# Altium PCB Anahata_Control_PCB.PcbDoc
Units mm, origin at the board's own origin, x right, y up, seen from the top; angles counter-clockwise.
Board outline 21.04 x 34.42 mm, 4 copper layers (Top Layer, Layer 1, Layer 2, Bottom Layer), stack 0.603 mm thick; 38 components, 50 nets, 148 pads, 12 vias.
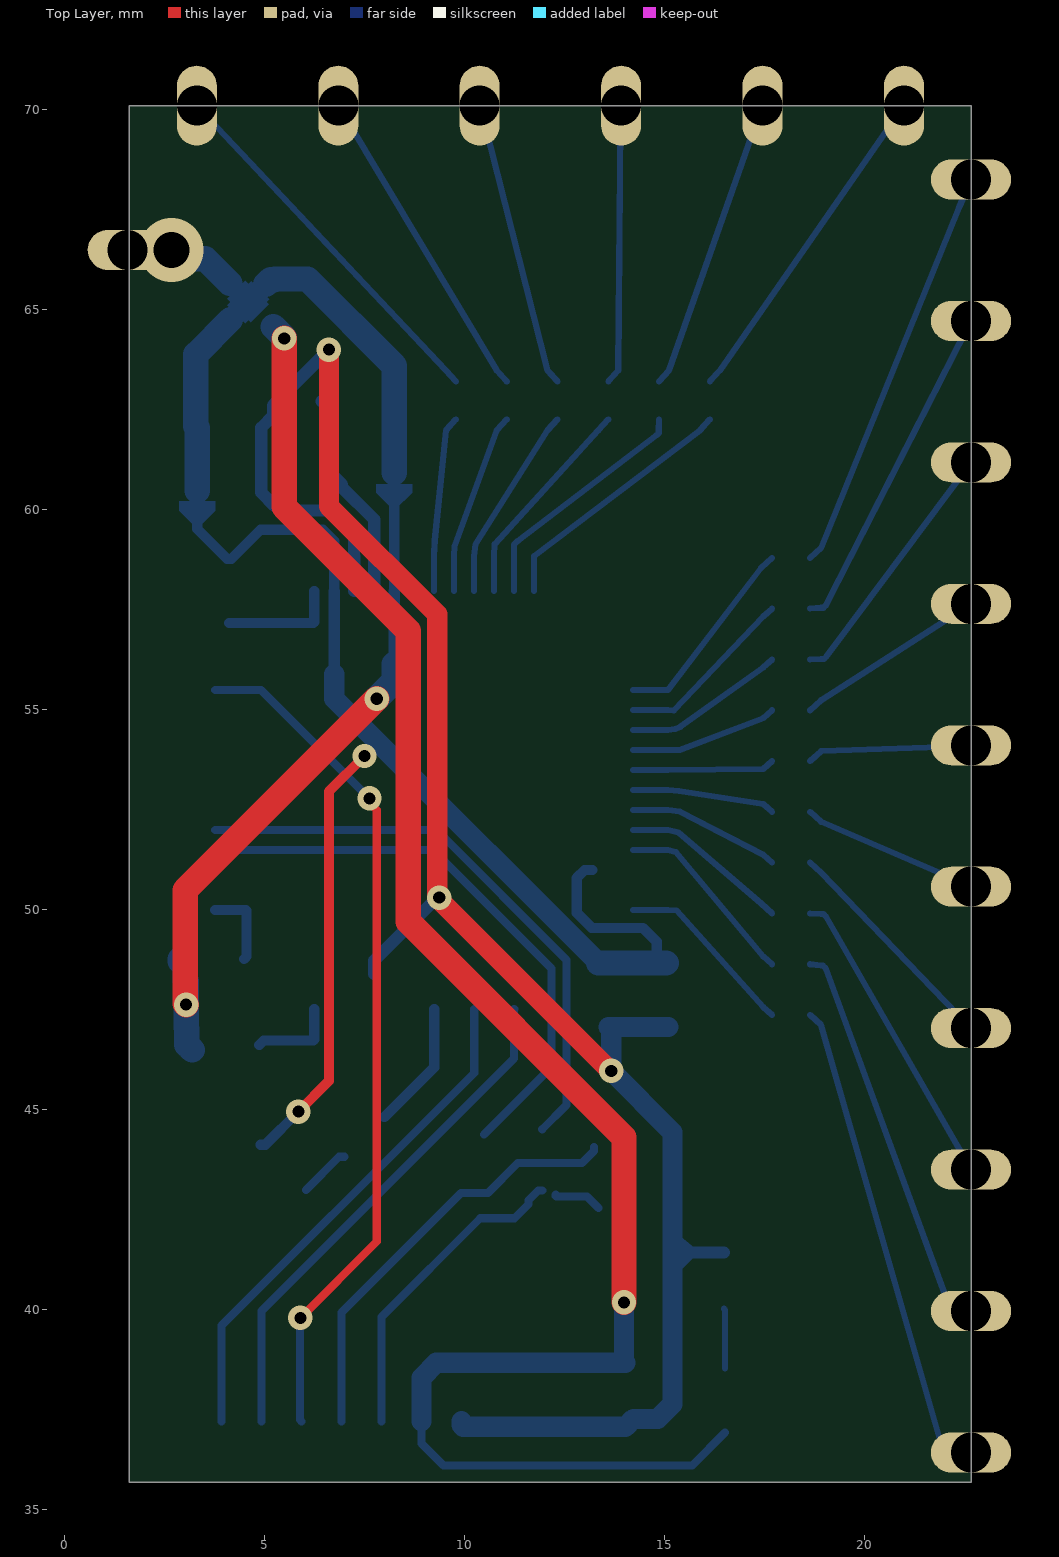
[diagram p0: Top Layer view]
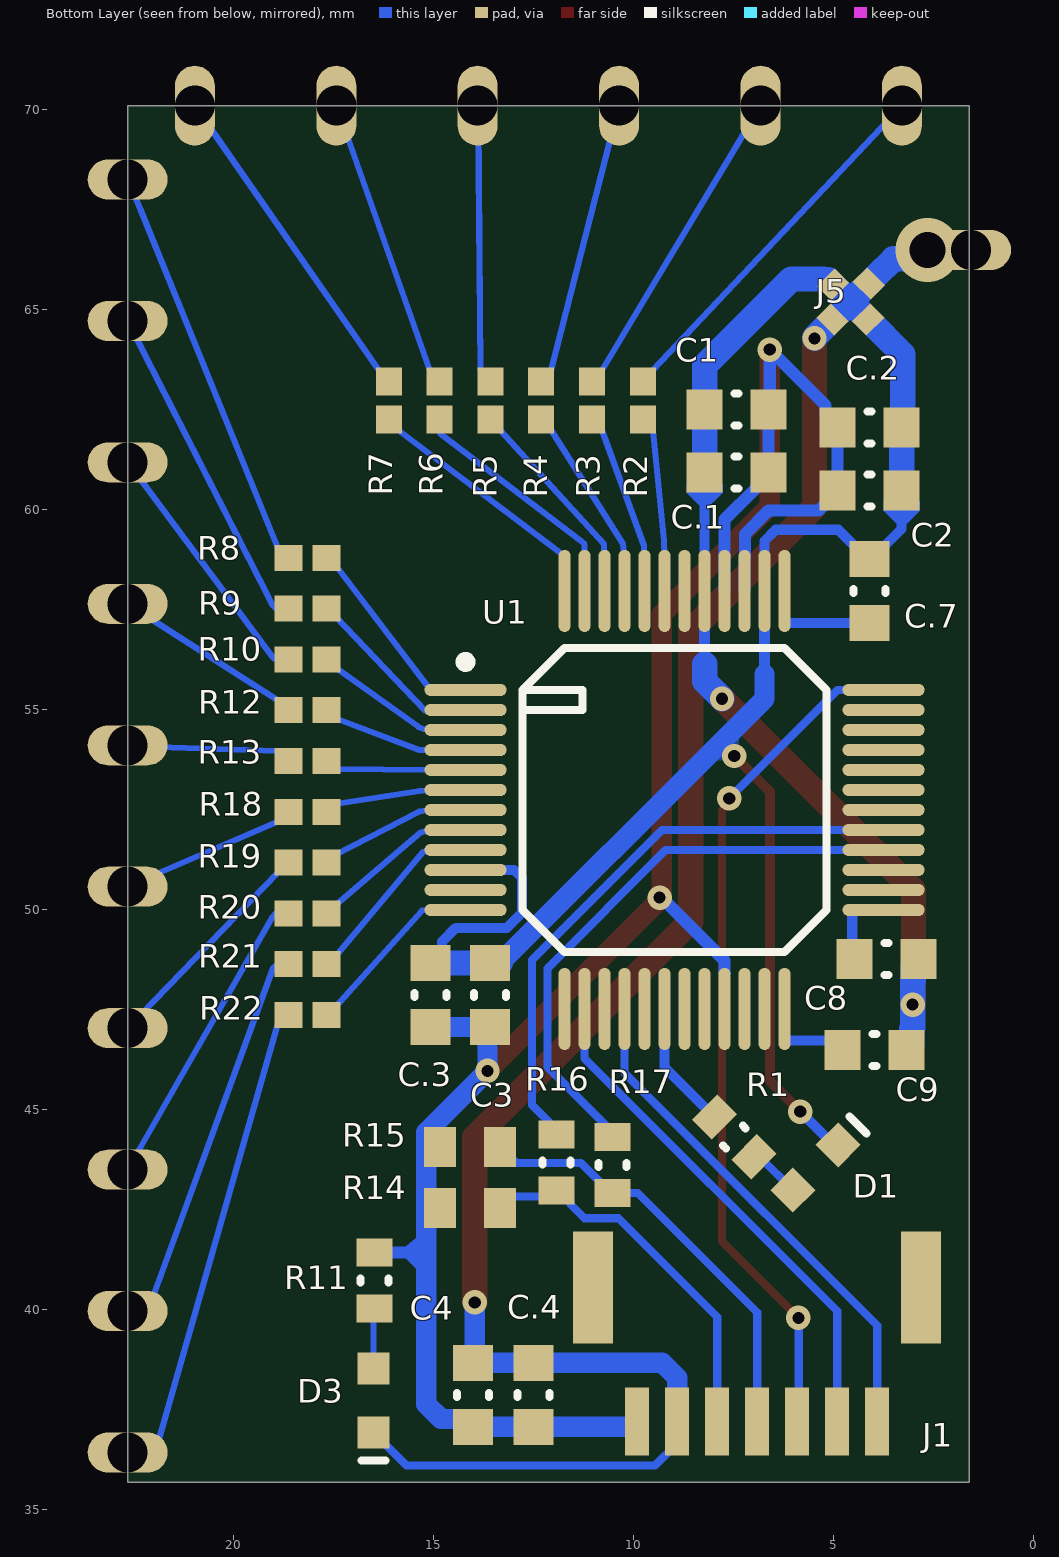
[diagram p1: Bottom Layer view, seen from below]

## Layer stack, top to bottom
Top Solder: solder mask 0.0102, Solder Resist, Dk 3.5
Top Layer: signal copper 0.0356
Dielectric 2: prepreg 0.0711, PP-006, Dk 4.1
Layer 1: signal copper 0.035
Dielectric 1: dielectric 0.32, FR-4, Dk 4.8
Layer 2: signal copper 0.035
Dielectric 3: prepreg 0.0711, PP-006, Dk 4.1
Bottom Layer: signal copper 0.0356
Bottom Solder: solder mask 0.0102, Solder Resist, Dk 3.5

## Board outline
1.612,35.687 22.657,35.687 22.657,70.104 1.612,70.104

## Design rules (kind name [scope] priority, off if disabled: settings)
BoardOutlineClearance [All] p1: gap=0.254 ignorepadtopadclearanceinfootprint=FALSE except(0: Arc-SplitContinuation Track-SplitContinuation SMDPad-SplitContinuation THPad-SplitContinuation Via-SplitContinuation Fill-SplitContinuation Poly-SplitContinuation Region-SplitContinuation Text-SplitContinuation; 0.508: Poly-OutlineEdge Poly-CavityEdge Poly-CutoutEdge Poly-SplitBarrior)
Clearance [All] p1: gap=0.152 ignorepadtopadclearanceinfootprint=FALSE except(0.305: Arc-Hole Track-Hole SMDPad-Hole THPad-Hole Via-Hole Fill-Hole Poly-Hole Region-Hole)
HoleSize [All] p1: absolutevalues=TRUE maxlimit=6.3 minlimit=0.3 maxpercent=80.000 minpercent=20.000
MinimumAnnularRing [All] p1: minimumring=0.152
MinimumSolderMaskSliver [All] p1: minsoldermaskwidth=0.178
PolygonConnect PolygonConnect_1 [All] p1: thpad.connectstyle=Relief thpad.reliefconductorwidth=0.254 thpad.reliefentries=4 thpad.polygonreliefangle="90 Angle" thpad.airgapwidth=0.254 smdpad.connectstyle=Direct smdpad.reliefconductorwidth=0.254 smdpad.reliefentries=4 smdpad.polygonreliefangle="90 Angle" smdpad.airgapwidth=0.254 via.connectstyle=Direct via.reliefconductorwidth=0.254 via.reliefentries=4 via.polygonreliefangle="90 Angle" via.airgapwidth=0.254
PolygonConnect gnd_stitch_via [InNet('GND') vs InNet('GND')] p2: thpad.connectstyle=Relief thpad.reliefconductorwidth=0.254 thpad.reliefentries=4 thpad.polygonreliefangle="90 Angle" thpad.airgapwidth=0.254 smdpad.connectstyle=Relief smdpad.reliefconductorwidth=0.254 smdpad.reliefentries=4 smdpad.polygonreliefangle="90 Angle" smdpad.airgapwidth=0.254 via.connectstyle=Direct via.reliefconductorwidth=0.254 via.reliefentries=4 via.polygonreliefangle="90 Angle" via.airgapwidth=0.254
PolygonConnect gnd_ties [InComponentClass('net_ties')] p3: connectstyle=Direct reliefconductorwidth=0.254 reliefentries=4 polygonreliefangle="90 Angle" airgapwidth=0.254
RoomDefinition Power [InComponentClass('Power')] p1: confinementstyle=ConfineOut formatcopy=TRUE lockcomponents=FALSE outline 47.346,-89.306 98.146,-89.306 98.146,-63.906 47.346,-63.906
RoomDefinition CY8C4125AZI-S433 [InComponentClass('CY8C4125AZI-S433')] p2: confinementstyle=ConfineOut formatcopy=TRUE lockcomponents=FALSE outline -10.363,-89.306 40.437,-89.306 40.437,-63.906 -10.363,-63.906
RoomDefinition CSX_Capsense [InComponentClass('CSX_Capsense')] p3: confinementstyle=ConfineOut formatcopy=TRUE lockcomponents=FALSE outline 57.455,-42.062 65.964,-42.062 65.964,-37.49 57.455,-37.49
RoomDefinition Comm [InComponentClass('Comm')] p4: confinementstyle=ConfineOut formatcopy=TRUE lockcomponents=FALSE outline 60.96,-47.244 64.77,-47.244 64.77,-42.672 60.96,-42.672
RoutingVias [All] p1: holewidth=0.711 width=1.27 viastyle="Through Hole" minholewidth=0.305 minwidth=0.61 maxholewidth=1.27 maxwidth=2.54
SilkToSilkClearance [All] p1: silktosilkclearance=0.102
SilkToSolderMaskClearance [IsPad] p1: minsilkscreentomaskgap=0.178 clearancetoexposedcopper=TRUE
SolderMaskExpansion [All] p1: expansion=0.102 istentingtop=FALSE
Width [All] p1: maxlimit=3.556 minlimit=0.152 preferedwidth=0.254 toplayer_maxwidth=2.54 midlayer1_maxwidth=2.54 midlayer2_maxwidth=2.54 minimp=50.000000 maximp=50.000000 favimp=50.000000
26 further rules are at their usual default settings.

## Classes and differential pairs
component class Power: D3 J5 R11
component class CY8C4125AZI-S433: C1 C2 C3 C.1 C.2 C.3 C.7 R14 R15 R16 R17 U1
component class CSX_Capsense: C8 C9 R2 R3 R4 R5 R6 R7 R8 R9 R10 R12 R13 R18 R19 R20 R21 R22
component class Comm: C4 C.4 D1 J1 R1

## Components (designator, comment, footprint, x,y, rotation, side; value= is the part's Value field where it differs from the comment)
C1 "1uF" CAPC0603(1608)100_N 7.436,62.503 r180 bottom
C2 "1uF" CAPC0603(1608)100_N 4.111,60.482 r180 bottom
C3 "1uF" CAPC0603(1608)100_N 13.594,47.873 r90 bottom
C4 "1uF" CAPC0603(1608)100_N 14.021,37.877 r90 bottom
C8 "470pF" CAPC0603(1608)100_N 3.683,48.768 r180 bottom
C9 "470pF" CAPC0603(1608)100_N 3.986,46.497 r180 bottom
C.1 "0.1uF" CAPC0603(1608)100_N 7.436,60.932 r180 bottom value=1uF
C.2 "0.1uF" CAPC0603(1608)100_N 4.111,62.053 r180 bottom value=1uF
C.3 "0.1uF" CAPC0603(1608)100_N 15.086,47.873 r90 bottom value=1uF
C.4 "0.1uF" CAPC0603(1608)100_N 12.512,37.877 r90 bottom value=1uF
C.7 "0.1uF" CAPC0603(1608)100_N 4.111,57.973 r90 bottom value=1uF
D1 "150060BS75000" 0603_A 5.461,43.561 r315 bottom
D3 "150060BS75000" 0603_A 16.509,37.731 r90 bottom
J1 "BM07B-NSHSS-TBT (LF)(SN)" "BM07B-NSHSS-TBT (LF)(SN)" 16.919,45.214 r0 bottom
J5 "Star_tie" Star_tie -464.314,-427.229 r225 bottom net-tie
R1 "330" RESC0603(1608)_L 7.493,44.323 r225 bottom value="330.00 Ohm"
R2 "RC0402JR-072KL" RESC1005X40X25ML05T10 9.779,62.738 r270 bottom
R3 "RC0402JR-072KL" RESC1005X40X25ML05T10 11.049,62.738 r270 bottom
R4 "RC0402JR-072KL" RESC1005X40X25ML05T10 12.319,62.738 r270 bottom
R5 "RC0402JR-072KL" RESC1005X40X25ML05T10 13.589,62.738 r270 bottom
R6 "RC0402JR-072KL" RESC1005X40X25ML05T10 14.859,62.738 r270 bottom
R7 "RC0402JR-072KL" RESC1005X40X25ML05T10 16.129,62.738 r270 bottom
R8 "RC0402JR-072KL" RESC1005X40X25ML05T10 18.161,58.801 r0 bottom
R9 "RC0402JR-072KL" RESC1005X40X25ML05T10 18.161,57.531 r0 bottom
R10 "RC0402JR-072KL" RESC1005X40X25ML05T10 18.161,56.261 r0 bottom
R11 "330" RESC0603(1608)_L 16.485,40.732 r270 bottom value="330.00 Ohm"
R12 "RC0402JR-072KL" RESC1005X40X25ML05T10 18.161,54.991 r0 bottom
R13 "RC0402JR-072KL" RESC1005X40X25ML05T10 18.161,53.721 r0 bottom
R14 "4.7K" RESC1608X55X25ML10T15 14.097,42.545 r0 bottom
R15 "4.7K" RESC1608X55X25ML10T15 14.097,44.069 r0 bottom
R16 "330" RESC0603(1608)_L 11.938,43.688 r270 bottom value="330.00 Ohm"
R17 "330" RESC0603(1608)_L 10.541,43.623 r270 bottom value="330.00 Ohm"
R18 "RC0402JR-072KL" RESC1005X40X25ML05T10 18.161,52.451 r0 bottom
R19 "RC0402JR-072KL" RESC1005X40X25ML05T10 18.161,51.181 r0 bottom
R20 "RC0402JR-072KL" RESC1005X40X25ML05T10 18.161,49.911 r0 bottom
R21 "RC0402JR-072KL" RESC1005X40X25ML05T10 18.161,48.641 r0 bottom
R22 "RC0402JR-072KL" RESC1005X40X25ML05T10 18.161,47.371 r0 bottom
U1 "CY8C4125AZI-S433" CY8C4125AZI-S433 8.986,52.748 r180 bottom locked

## Footprints (in the part's own frame and the unit in brackets; to place one, negate y for a bottom-side part, rotate by r counter-clockwise, add the part's x,y. Pads: shape width x height; smd on the part's side, far side on the other; paste and mask are expansions set on the pad)
0603_A [mm] "Chip LED, 2-Leads, Body 1.6x0.8mm, IPC Medium Density"
  rect 0.8x0.8 smd: 1(-0.8,0) 2(0.8,0)
  silkscreen extent -1.5,-0.3 -1.5,0.3, body extent -0.8,-0.4 0.8,0.4, height 0.7
"BM07B-NSHSS-TBT (LF)(SN)" [mm]
  rect 1x2.8 smd paste-2.54 mask+0.1: 0(-14.1,4.65) 0(-5.9,4.65)
  rect 0.6x1.7 smd paste-2.54 mask+0.1: 1(-13,8) 2(-12,8) 3(-11,8) 4(-10,8) 5(-9,8) 6(-8,8) 7(-7,8)
CAPC0603(1608)100_N [mm] "Chip Capacitor, Body 1.6x0.8mm, Height 1.0mm, IPC Medium Density"
  rect 0.9x1 smd: 1(-0.8,0) 2(0.8,0)
  silkscreen extent -0.05,-0.4 0.05,0.4, body extent -0.87,-0.48 0.88,0.47, height 1
CY8C4125AZI-S433 [mm] "CQFP, 48-Leads, Body 11.70x11.70mm, Pitch 0.50mm, IPC Medium Density"
  oval 2.05x0.3 smd: 1(-5.225,2.75) 2(-5.225,2.25) 3(-5.225,1.75) 4(-5.225,1.25) 5(-5.225,0.75) 6(-5.225,0.25) 7(-5.225,-0.25) 8(-5.225,-0.75) 9(-5.225,-1.25) 10(-5.225,-1.75) 11(-5.225,-2.25) 12(-5.225,-2.75) 25(5.225,-2.75) 26(5.225,-2.25) 27(5.225,-1.75) 28(5.225,-1.25) 29(5.225,-0.75) 30(5.225,-0.25) 31(5.225,0.25) 32(5.225,0.75) 33(5.225,1.25) 34(5.225,1.75) 35(5.225,2.25) 36(5.225,2.75)
  oval 0.3x2.05 smd: 13(-2.75,-5.225) 14(-2.25,-5.225) 15(-1.75,-5.225) 16(-1.25,-5.225) 17(-0.75,-5.225) 18(-0.25,-5.225) 19(0.25,-5.225) 20(0.75,-5.225) 21(1.25,-5.225) 22(1.75,-5.225) 23(2.25,-5.225) 24(2.75,-5.225) 37(2.75,5.225) 38(2.25,5.225) 39(1.75,5.225) 40(1.25,5.225) 41(0.75,5.225) 42(0.25,5.225) 43(-0.25,5.225) 44(-0.75,5.225) 45(-1.25,5.225) 46(-1.75,5.225) 47(-2.25,5.225) 48(-2.75,5.225)
  silkscreen extent -5.35,-3.8 3.8,3.8, body extent -3.5,-3.5 3.5,3.5, height 1.4
RESC0603(1608)_L [mm] "Chip Resistor, Body 1.6x0.8mm, IPC High Density"
  rect 0.7x0.9 smd: 1(-0.7,0) 2(0.7,0)
  silkscreen extent -0.05,-0.35 0.05,0.35, body extent -0.85,-0.47 0.85,0.47, height 0.6
RESC1005X40X25ML05T10 [mm] "Chip Resistor, 2-Leads, Body 1.00x0.50mm, IPC Low Density"
  rect 0.7x0.65 smd: 1(-0.475,0) 2(0.475,0)
  body extent -0.53,-0.27 0.53,0.28, height 0.4
RESC1608X55X25ML10T15 [mm] "Chip Resistor, 2-Leads, Body 1.60x0.80mm, IPC Low Density"
  rect 0.8x1 smd: 1(-0.75,0) 2(0.75,0)
  body extent -0.85,-0.45 0.85,0.45, height 0.55
Star_tie [mil]
  rect 25x20 smd paste-100 mask-100: 1(-26762.49,680.64) 3(-26762.49,630.26)
  rect 20x25 smd paste-100 mask-100: 2(-26737.66,654.99) 4(-26786.7,654.78)
  Top Layer region: -26745.42,667.45 -26745.42,642.48 -26778.84,642.46 -26778.84,667.42 -26763.57,667.28
  Top Layer region: -26774.88,671.64 -26749.93,671.64 -26749.91,638.84 -26774.87,638.84 -26774.72,654.84

## Part data
C1 C2 C3 C4: library part CMP-1035-02746-1, "CAP 1uF 50V ±20% 0603 (1608 Metric) Thickness 1mm SMD", Case-EIA=0603, Case-Metric=1608, Rated Voltage="50 V", Tolerance=Â±20%, Max Thickness="1 mm", Technology=SMT
C8 C9: library part CMP-1035-01661-1, "CAP 470pF 10V ±10% 0603 (1608 Metric) Thickness 1mm SMD", Case-EIA=0603, Case-Metric=1608, Rated Voltage="10 V", Tolerance=Â±10%, Max Thickness="1 mm", Technology=SMT
C.1 C.2 C.3 C.4 C.7: library part CMP-1035-02746-1, "CAP 0.1 uF 50V ±20% 0603 (1608 Metric) Thickness 1mm SMD", Case-EIA=0603, Case-Metric=1608, Rated Voltage="50 V", Tolerance=Â±20%, Max Thickness="1 mm", Technology=SMT
D1 D3: library part CMP-1426-00003-1, "SMD mono-color Chip LED, WL-SMCW, Blue", Color=Blue, Manufacturer="Wuerth Elektronik", ComponentLink1Description="Manufacturer URL", ComponentLink1URL=http://www.we-online.com, ComponentLink2Description=Datasheet, ComponentLink2URL=http://katalog.we-online.com/led/datasheet/150060BS75000.pdf, PackageReference=0603_A, PartNumber=150060BS75000
R1 R11 R16 R17: library part CMP-1012-00062-1, "330R 0.1W 5% 0603 (1608 Metric)  SMD", Case-EIA=0603, Case-Metric=1608, Power="0.1 W", Tolerance="5 %", Technology=SMT
R2 R3 R4 R5 R6 R7 R8 R9 R10 R12 R13 R18 R19 R20 R21 R22: library part CMP-2002-07972-1, Manufacturer="Yageo / Phycomp", Part Number=RC0402JR-072KL
R14 R15: library part CMP-2000-05024-1, "RC0603JR-074K7L Chip Resistor, 4.7 KOhm, +/- 5%, 100 mW, -55 to 155 degC, 0603 (1608 Metric), RoHS, Tape and Reel", Case Code - in=0603, Case Code - mm=1608, Manufacturer=Yageo, Operating Temperature Range=-55Cto+155C, Package Description="2-Pin Surface Mount Device, Body 1.6 x 0.8 mm", Package Reference=603, Power Rating=100mW, Resistance=4.7kOhms, Temperature Coefficient=100PPM/C, Tolerance=5%, Voltage Rating=50V, Datasheet URL=http://www.yageo.com/documents/recent/PYu-RC_Group_51_RoHS_L_04.pdf, Datasheet Version="Rev. 4, 02/2016", Manufacturer URL=http://www.yageo.com/, Packaging=Reel, Product=ThickFilmResistorsGeneralPurpose, Series=RC, Termination Style=SMD/SMT

## Free pads (board coordinates)
  oval 2x1 hole 1: 4(1.574,66.499) 4(22.657,36.435) 4(22.657,39.971) 4(22.657,43.507) 4(22.657,47.043) 4(22.657,50.579) 4(22.657,54.115) 4(22.657,57.651) 4(22.657,64.722) 4(22.657,68.258) 4(22.657,61.187)
  oval 1x2 hole 1: 4(3.302,70.104) 4(6.838,70.104) 4(10.373,70.104) 4(13.909,70.104) 4(17.444,70.104) 4(20.979,70.104)

## Via types
v1: diameter 0.61/0.61/0.61/0.61 (per signal layer), hole 0.305, Top Layer to Bottom Layer, 11 vias
v2: diameter 1.6, hole 0.9, Top Layer to Bottom Layer, 1 vias

## Nets (pads, with @x,y where several pads share a name; then routed paths per layer and width w, separated by ;. In a path a pad name is that pad's centre, name@x,y a point inside that pad or via, vN(x,y) a via of type N, cw(c..) or ccw(c..) an arc to the next point about the centre after c; other vN are vias at no path point)
+3v3: C1.2 C2.1 C3.1 C4.1 C.1.2 C.2.1 C.3.1 C.4.1 J1.7 R11.1 R14.2 R15.2 U1.21 U1.39 U1.40 | length 57.3
  Top Layer w0.508: v1(6.604,64.008) 6.604,60.093 9.31,57.387 9.31,50.357 v1(9.361,50.306) ; v1@9.31,50.306 13.642,45.974 v1(13.661,45.974)
  Bottom Layer w0.305: U1.39 7.236,58.843 7.227,58.852 7.227,59.391 6.636,59.982 5.383,59.982 5.256,60.109 5.234,60.109 4.911,60.432 C2.1 C.2.1 5.209,62.351 5.209,62.613 v1(6.604,64.008) 6.604,62.891 6.426,62.713 C1.2 C.1.2 6.934,60.634 6.934,60.561 7.736,59.759 U1.40 ; U1.21@7.736,48.395 7.736,48.733 9.31,50.306 v1(9.361,50.306) ; 15.103,41.541 15.192,41.451 15.211,41.432 R11.1
  Bottom Layer w0.508: J1.7 9.919,37.123 9.965,37.077 C.4.1 C4.1 14.217,37.273 14.825,37.273 15.192,37.64 15.192,41.451 15.192,44.443 v1(13.661,45.974) 13.661,47.005 C3.1 C.3.1
CintA: C9.1 U1.24 | length 2.2
  Bottom Layer w0.254: C9.1@4.861,46.622 4.975,46.736 6.215,46.736 6.236,46.757 U1.24
CintB: C8.1 U1.25 | length 2
  Bottom Layer w0.254: U1.25 4.524,49.998 4.546,49.977 4.546,48.831 C8.1
GND: C4.2 C.4.2 D3.1 J1.6 J5.3 | length 44.6
  Top Layer w0.635: v1(5.486,64.287) 5.486,60.074 8.586,56.974 8.586,49.707 13.98,44.313 v1(13.98,40.188)
  Bottom Layer w0.203: J1.6 8.919,36.664 9.473,36.11 15.687,36.11 D3.1
  Bottom Layer w0.508: J1.6 8.919,38.305 9.291,38.677 C.4.2 C4.2 13.98,38.718 v1(13.98,40.188)
  Bottom Layer w0.635: J5.3@5.213,64.58 5.486,64.307 v1(5.486,64.287)
LED2: R1.1 U1.18 | length 3.2
  Bottom Layer w0.254: R1.1 9.236,46.066 U1.18
NetC.7_1: C.7.1 U1.37 | length 2.9
  Bottom Layer w0.254: C.7.1 6.215,57.173 6.236,57.194 U1.37
NetD1_2: D1.2 R1.2 | length 1.3
  Bottom Layer w0.203: D1.2 6.859,43.828 R1.2
NetD3_2: D3.2 R11.2 | length 1.5
  Bottom Layer w0.152: R11.2 16.481,40.029 16.509,40.001 D3.2
NetR16_1: R16.1 U1.29 | length 14.6
  Bottom Layer w0.203: U1.29 9.3,51.998 12.548,48.75 12.548,45.125 R16.1@11.938,44.515
NetR17_1: R17.1 U1.28 | length 14.5
  Bottom Layer w0.203: U1.28 9.207,51.498 12.167,48.539 12.167,46.076 R17.1@10.477,44.386
RX0: R8.1 U1.1 | length 5.1
  Bottom Layer w0.152: U1.1 15.086,55.498 17.412,58.552 R8.1
RX0_PAD: pad.4@22.657,68.258 R8.2 | length 10.3
  Bottom Layer w0.152: R8.2 18.91,59.05 22.326,67.481 22.37,67.585 pad.4@22.657,68.258
RX1: R9.1 U1.2 | length 4.6
  Bottom Layer w0.152: U1.2 15.086,54.998 15.225,54.986 17.463,57.333 R9.1
RX1_PAD: pad.4@22.657,64.722 R9.2 | length 8.4
  Bottom Layer w0.152: R9.2 18.91,57.552 18.967,57.552 19.028,57.614 22.366,64.153 pad.4@22.657,64.722
RX2: R10.1 U1.3 | length 4
  Bottom Layer w0.152: U1.3 15.086,54.498 15.258,54.517 15.393,54.579 17.463,56.063 R10.1
RX2_PAD: pad.4@22.657,61.187 R10.2 | length 6.5
  Bottom Layer w0.152: R10.2 18.91,56.27 18.979,56.27 19.032,56.322 22.326,60.743 22.357,60.784 pad.4@22.657,61.187
RX3: R12.1 U1.4 | length 3.7
  Bottom Layer w0.152: U1.4 15.086,53.998 15.373,54 17.463,54.793 R12.1
RX3_PAD: pad.4@22.657,57.651 R12.2 | length 4.8
  Bottom Layer w0.152: R12.2 18.91,55.24 22.338,57.44 pad.4@22.657,57.651
RX4: R13.1 U1.5 | length 3.6
  Bottom Layer w0.152: U1.5 15.086,53.498 17.463,53.523 R13.1
RX4_PAD: pad.4@22.657,54.115 R13.2 | length 4.1
  Bottom Layer w0.152: R13.2 18.91,53.97 22.326,54.083 pad.4@22.657,54.115
RX5: R18.1 U1.6 | length 3.6
  Bottom Layer w0.152: U1.6 15.086,52.998 15.357,52.976 17.463,52.649 R18.1
RX5_PAD: pad.4@22.657,50.579 R18.2 | length 4.5
  Bottom Layer w0.152: R18.2 18.91,52.202 22.329,50.731 pad.4@22.657,50.579
RX6: R19.1 U1.7 | length 3.8
  Bottom Layer w0.152: U1.7 15.086,52.498 15.378,52.457 17.463,51.379 R19.1
RX6_PAD: pad.4@22.657,47.043 R19.2 | length 5.8
  Bottom Layer w0.152: R19.2 18.91,50.932 22.326,47.383 22.349,47.359 pad.4@22.657,47.043
RX7: R20.1 U1.8 | length 4.2
  Bottom Layer w0.152: U1.8 15.086,51.998 15.34,51.934 17.412,50.16 R20.1
RX7_PAD: pad.4@22.657,43.507 R20.2 | length 7.7
  Bottom Layer w0.152: R20.2 18.91,49.893 18.971,49.893 19.03,49.834 22.326,44.083 22.363,44.019 pad.4@22.657,43.507
RX8: R21.1 U1.9 | length 4.8
  Bottom Layer w0.152: U1.9 15.086,51.498 15.274,51.446 17.463,48.839 R21.1
RX8_PAD: pad.4@22.657,39.971 R21.2 | length 10
  Bottom Layer w0.152: R21.2 18.91,48.609 18.954,48.609 19.023,48.541 22.157,39.971 22.379,39.974 pad.4@22.657,39.971
RX9: R22.1 U1.12 | length 4.6
  Bottom Layer w0.152: U1.12 15.086,49.998 15.296,49.983 17.463,47.569 R22.1
RX9_PAD: pad.4@22.657,36.435 R22.2 | length 12.1
  Bottom Layer w0.152: R22.2 18.91,47.122 21.913,36.636 21.991,36.558 pad.4@22.657,36.435
SCL: J1.4 R15.1 R17.2 | length 10.8
  Bottom Layer w0.203: J1.4 6.919,39.939 9.905,42.925 10.578,42.925 11.324,43.671 12.934,43.671 13.232,43.969 R15.1@13.232,44.069
SCLK_SWD: J1.1 U1.16 | length 12.9
  Bottom Layer w0.203: J1.1 3.919,39.606 9.474,45.161 10.236,45.923 U1.16
SDA: J1.5 R14.1 R16.2 | length 9.2
  Bottom Layer w0.203: J1.5 7.919,39.823 10.387,42.291 11.241,42.291 11.59,42.64 11.59,42.74 11.838,42.988 R16.2 ; R16.2@12.275,42.878 12.275,42.849 12.286,42.838 13.054,42.838 R14.1
SDAT: J1.2 U1.14 | length 12.9
  Bottom Layer w0.203: J1.2 4.919,39.971 11.234,46.286 11.234,47.521 U1.14
TX0: R2.2 U1.43 | length 4.4
  Bottom Layer w0.152: U1.43 9.236,58.848 9.25,59.239 9.53,61.989 R2.2
TX0_PAD: pad.4@3.302,70.104 R2.1 | length 9.5
  Bottom Layer w0.152: pad.4@3.302,70.104 3.593,69.794 3.613,69.774 9.53,63.487 R2.1
TX1: R3.2 U1.44 | length 4.6
  Bottom Layer w0.152: U1.44 9.736,58.848 9.749,59.099 10.8,61.989 R3.2
TX1_PAD: pad.4@6.838,70.104 R3.1 | length 8.1
  Bottom Layer w0.152: pad.4@6.838,70.104 7.034,69.783 10.8,63.487 R3.1
TX2: R4.2 U1.45 | length 4.9
  Bottom Layer w0.152: U1.45 10.236,58.848 10.271,59.139 12.07,61.989 R4.2
TX2_PAD: pad.4@10.373,70.104 R4.1 | length 7.2
  Bottom Layer w0.152: pad.4@10.373,70.104 10.466,69.774 12.07,63.487 R4.1
TX3: R5.2 U1.46 | length 5.4
  Bottom Layer w0.152: U1.46 10.736,58.848 10.748,59.144 13.34,61.989 R5.2
TX3_PAD: pad.4@13.909,70.104 R5.1 | length 7
  Bottom Layer w0.152: R5.1 13.838,63.487 13.894,69.774 pad.4@13.909,70.104
TX4: R6.2 U1.47 | length 6.1
  Bottom Layer w0.152: U1.47 11.236,59.138 11.325,59.225 14.799,61.867 14.851,61.919 14.851,61.989 R6.2
TX4_PAD: pad.4@17.444,70.104 R6.1 | length 7.4
  Bottom Layer w0.152: R6.1 15.108,63.487 17.32,69.774 pad.4@17.444,70.104
TX5: R7.2 U1.48 | length 6.4
  Bottom Layer w0.152: U1.48 11.736,58.848 15.88,61.989 R7.2
TX5_PAD: pad.4@20.979,70.104 R7.1 | length 8.4
  Bottom Layer w0.152: R7.1 16.378,63.487 20.756,69.787 pad.4@20.979,70.104
VSS_Capsense: J5.1 pad.4@1.574,66.499 | length 1.8
  Bottom Layer w0.635: v2(2.666,66.499) 2.889,66.276 3.517,66.276 3.959,65.834 J5.1
VSSA: C1.1 C8.2 C9.2 C.1.1 J5.4 U1.41 | length 24.7
  Top Layer w0.635: v1(3.035,47.633) 3.013,47.655 3.013,50.494 v1(7.799,55.28)
  Bottom Layer w0.254: U1.41 C.1.1
  Bottom Layer w0.279: 8.236,56.147 U1.41
  Bottom Layer w0.635: C8.2 2.883,48.718 3.016,48.585 3.016,48.233 3.035,48.214 v1(3.035,47.633) 3.035,47.052 3.054,47.033 3.054,46.63 C9.2 ; J5.4@5.026,65.637 5.146,65.756 5.242,65.756 5.256,65.771 6.069,65.771 8.236,63.604 C1.1 C.1.1 ; v1(7.799,55.28) 8.236,55.718 8.236,56.147
VSSD: C2.2 C3.2 C.2.2 C.3.2 C.7.2 D1.1 J5.2 U1.10 U1.38 | length 40.4
  Top Layer w0.254: v1(5.842,44.958) 6.604,45.72 6.604,52.959 v1(7.493,53.848)
  Bottom Layer w0.254: C2.2 3.311,59.523 4.061,58.773 C.7.2 4.161,58.773 4.892,59.503 6.456,59.503 6.736,59.223 U1.38 ; D1.1 5.011,44.127 v1(5.842,44.958) ; v1(7.493,53.848) 7.493,53.913 7.798,54.218 ; 13.186,50.998 12.998,50.998 12.8,50.8 12.8,49.927 13.176,49.55 14.453,49.55 14.799,49.204 14.799,48.91 C.3.2@15.036,48.673
  Bottom Layer w0.279: 6.736,55.892 U1.38
  Bottom Layer w0.508: 6.736,55.892 6.736,55.28 7.798,54.218 C3.2@13.344,48.673
  Bottom Layer w0.635: C2.2 C.2.2 3.277,62.088 3.277,63.888 J5.2 ; C3.2@13.344,48.673 C3.2 C.3.2@15.036,48.673
XRES: J1.3 U1.36 | length 21.4
  Top Layer w0.203: v1(5.891,39.8) 7.8,41.709 7.8,52.497 7.62,52.677 v1(7.62,52.787)
  Bottom Layer w0.203: U1.36 4.91,55.498 v1(7.62,52.787) ; v1(5.891,39.8) 5.88,39.789 5.88,37.252 J1.3
pads on no net: J1.0 U1.11 U1.13 U1.15 U1.17 U1.19 U1.20 U1.22 U1.23 U1.26 U1.27 U1.30 U1.31 U1.32 U1.33 U1.34 U1.35 U1.42

## Polygon pours and split planes (outlines as drawn)
VSSD on Bottom Layer "VSSD_L04_P019" (solid, pour order 19): 8.157,53.86 8.039,53.742 7.387,53.742 7.387,54.375 7.514,54.502

## Other copper
Bottom Layer:
  region net VSSD: 3.761,59.982 3.311,59.532 2.861,59.982 2.861,60.211 3.759,60.211 3.761,60.213
  region net VSSA: 8.686,60.432 8.686,60.636 7.786,60.636 7.786,60.432 8.255,59.963 8.255,60.001
  region net +3v3: 15.192,40.777 15.015,41.451 15.015,42.141 15.866,41.451

## Silkscreen, mask and mechanical layers (free items; w line width, h text height)
Mechanical 1:
  lines w0.203: 1.612,35.687 22.657,35.687 22.657,70.104 1.612,70.104 1.612,58.037 1.612,35.687